# EAGLE board _v3 (EAGLE 8.5.1)
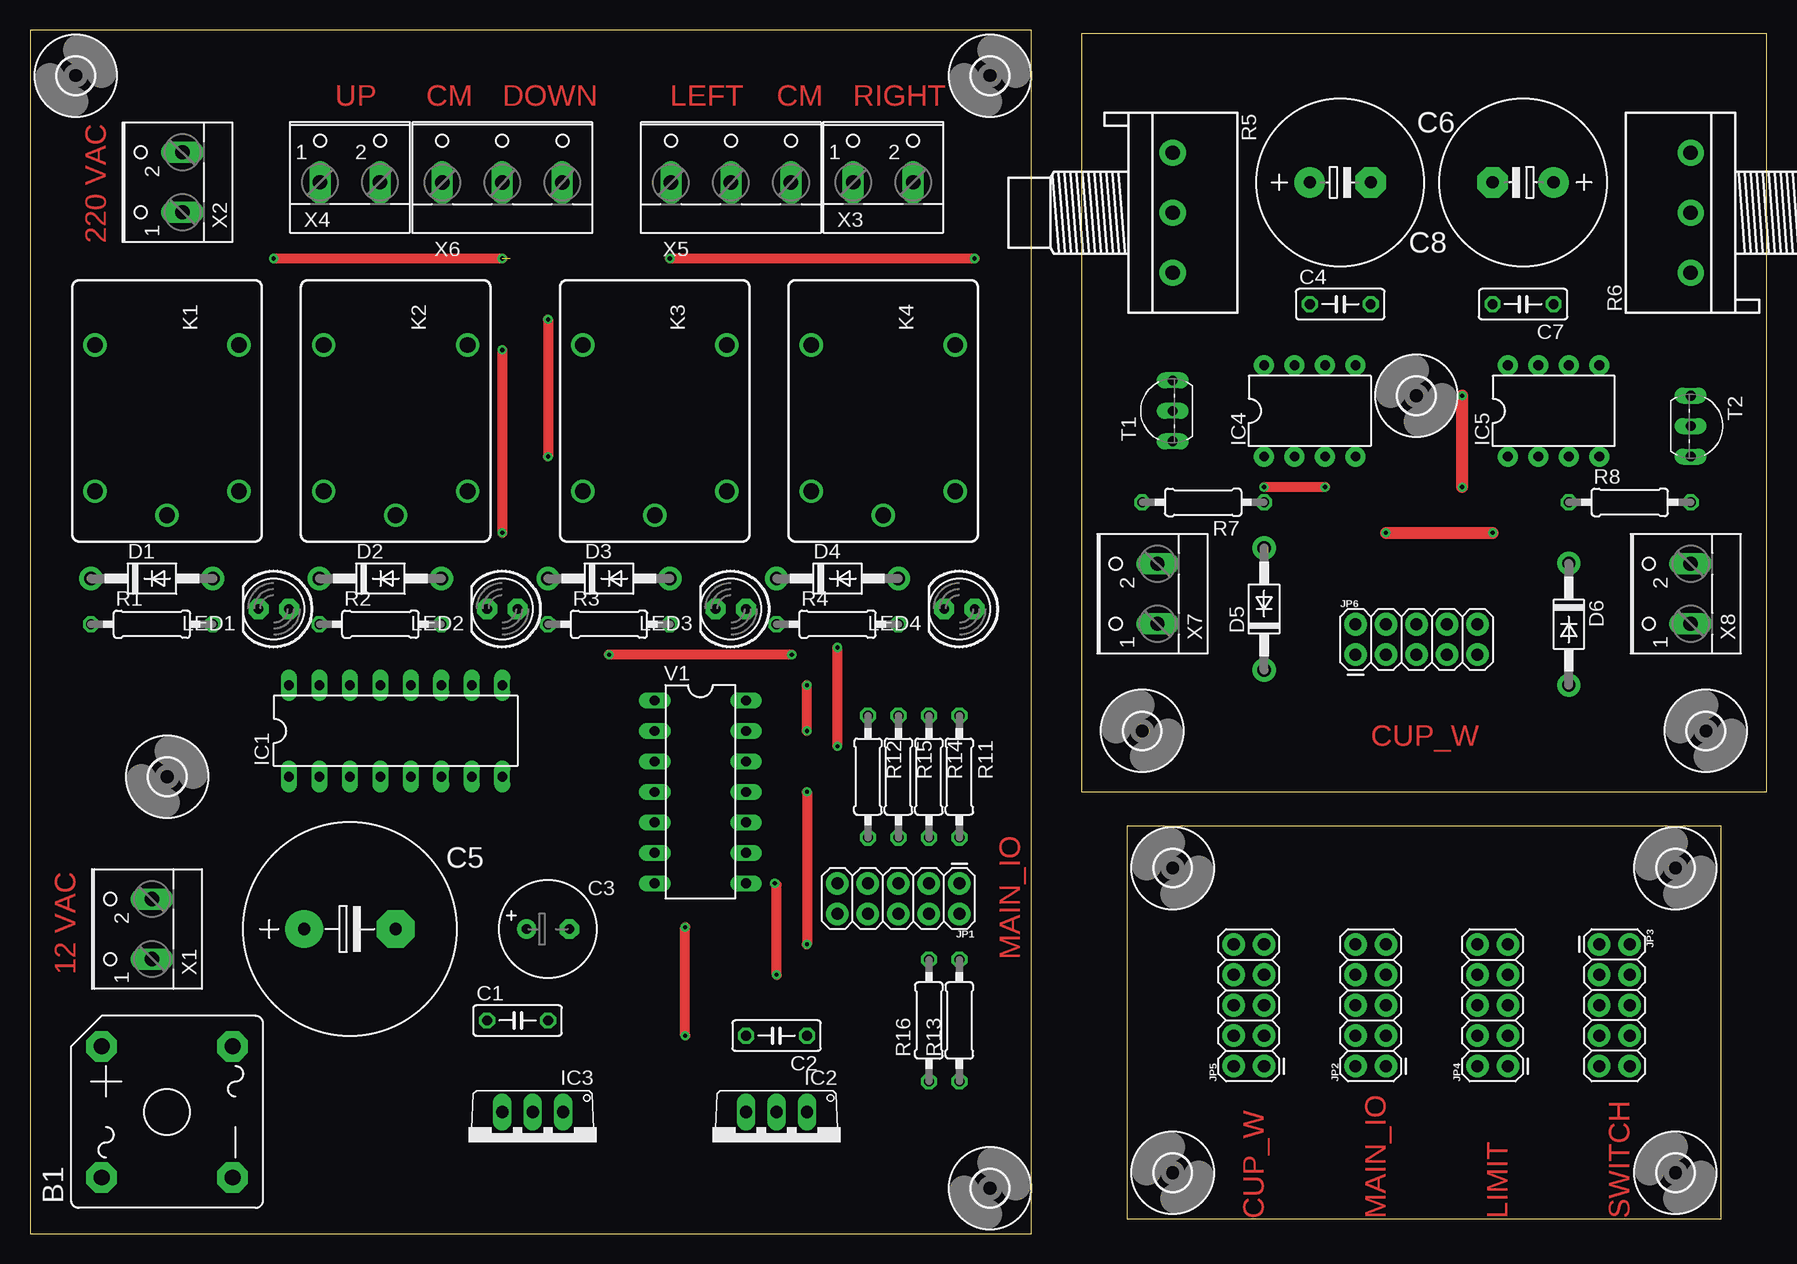
[diagram p0: board, top side]
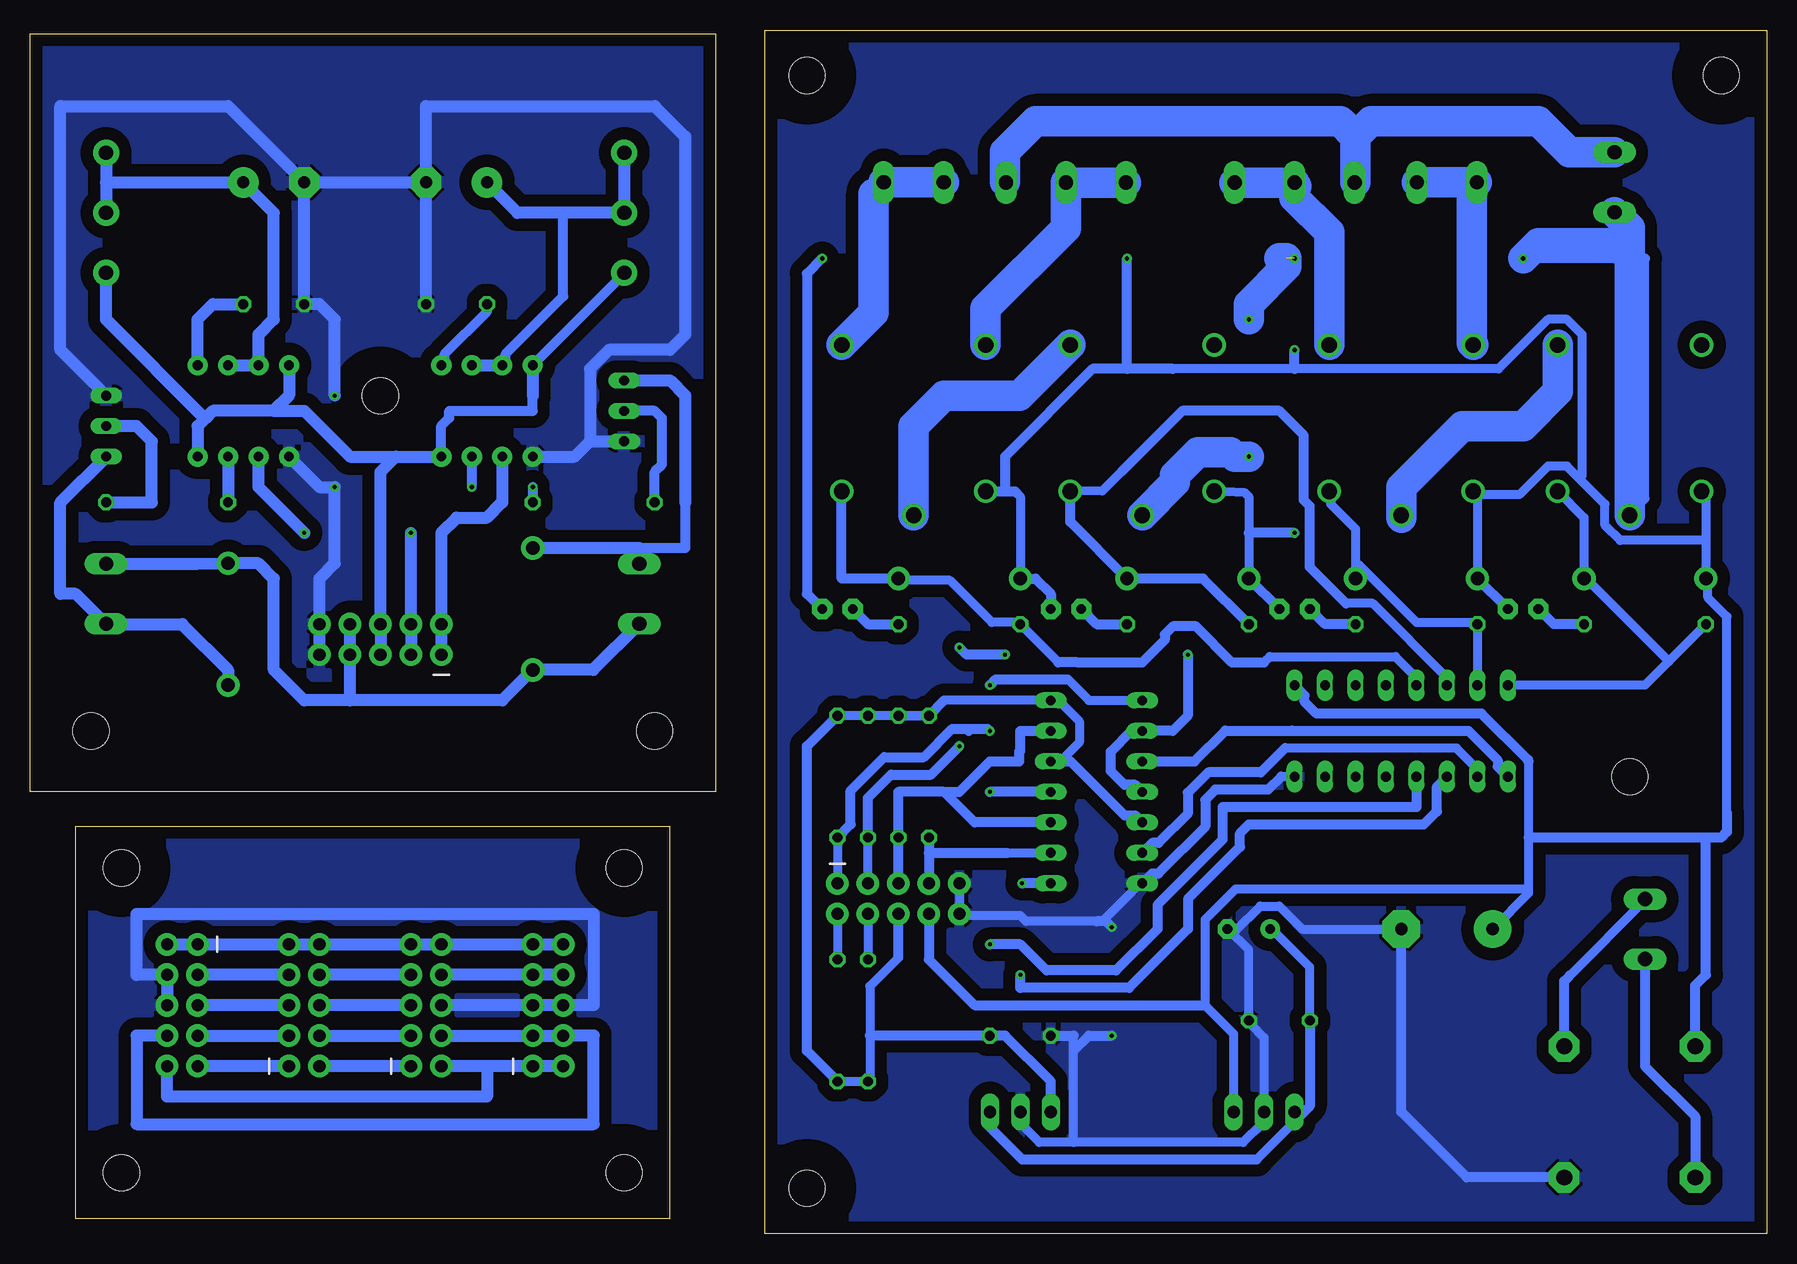
[diagram p1: board, bottom side, seen from below]

Size 144.78 x 100.32 mm. Coordinates in mm from the lower left corner, seen from the top.
Outline: 0,0 83.49,0 83.49,100.32 0,100.32 0,0
Outline: 140.97,1.27 140.97,33.96 91.45,33.96 91.45,1.27 140.97,1.27
Outline: 144.78,36.83 144.78,100 87.64,100 87.64,36.83 144.78,36.83
Copper layers (1*16): Top 0.035mm / dielectric 1.5mm / Bottom 0.035mm
Design rules "default *": minimum track width 6mil, minimum drill 0.35mm, track to track 40mil, track to pad 40mil, pad to pad 6mil, via to via 6mil, smd to smd 6mil, copper to edge 40mil, drill to drill 6mil, minimum pad ring 10mil, minimum via ring 8mil, stop-mask expansion 4mil, vias tented up to drill 0mil, thermal gap 10mil

## Footprints (pad centres in the part's own frame; a part is rotated, then mirrored left to right if it is on the bottom)
GBPC6 = drill 1.321 pad 2.54 octagon: + 5.461,5.461; - -5.461,-5.461; AC1 -5.461,5.461; AC2 5.461,-5.461
C050-025X075 = drill 0.813 octagon: 1 -2.54,0; 2 2.54,0
E3,5-8 = drill 0.813 pad 1.6: + -1.778,0 | drill 0.813 pad 1.6 octagon: - 1.778,0
E7,5-18 = drill 1.016 pad 3.15: + -3.81,0 | drill 1.016 pad 3.15 octagon: - 3.81,0
E5-13 = drill 1.016 pad 2.54: + -2.54,0 | drill 1.016 pad 2.54 octagon: - 2.54,0
DO41-10 = drill 1.118 pad 1.93: A 5.08,0; C -5.08,0
3,0 = hole 3: 0,0
DIL16 = drill 0.813 long: 1 -8.89,-3.81; 2 -6.35,-3.81; 3 -3.81,-3.81; 4 -1.27,-3.81; 5 1.27,-3.81; 6 3.81,-3.81; 7 6.35,-3.81; 8 8.89,-3.81; 9 8.89,3.81; 10 6.35,3.81; 11 3.81,3.81; 12 1.27,3.81; 13 -1.27,3.81; 14 -3.81,3.81; 15 -6.35,3.81; 16 -8.89,3.81
TO220V = drill 1.016 long: 1 -2.54,-2.54; 2 0,-2.54; 3 2.54,-2.54
DIL08-ROUND = drill 0.813 pad 1.676: 1 -3.81,-3.81; 2 -1.27,-3.81; 3 1.27,-3.81; 4 3.81,-3.81; 5 3.81,3.81; 6 1.27,3.81; 7 -1.27,3.81; 8 -3.81,3.81
2X5 = drill 1.016 pad 1.88: 1 0,0; 2 0,2.54; 3 2.54,0; 4 2.54,2.54; 5 5.08,0; 6 5.08,2.54; 7 7.62,0; 8 7.62,2.54; 9 10.16,0; 10 10.16,2.54
JS-M = drill 1.3: 1 6.7,6; 2 6.7,-6; C 8.7,0; NC -5.5,-6; NO -5.5,6
LED5MM = drill 0.813 pad 1.676 octagon: A -1.27,0; K 1.27,0
0207/10 = drill 0.813 octagon: 1 -5.08,0; 2 5.08,0
3RP/1610N = drill 1.2 pad 2.184: 1 -5,0; 2 0,0; 3 5,0
TO92-EBC-OVAL = drill 0.813 long: B 0,-1.27; C 2.54,-1.27; E -2.54,-1.27
DIL14 = drill 0.813 long: 1 -7.62,-3.81; 2 -5.08,-3.81; 3 -2.54,-3.81; 4 0,-3.81; 5 2.54,-3.81; 6 5.08,-3.81; 7 7.62,-3.81; 8 7.62,3.81; 9 5.08,3.81; 10 2.54,3.81; 11 0,3.81; 12 -2.54,3.81; 13 -5.08,3.81; 14 -7.62,3.81
W237-102 = drill 1.194 long: 1 -2.5,-1.27; 2 2.5,-1.27
W237-103 = drill 1.194 long: 1 -5,-1.29; 2 0,-1.29; 3 5,-1.29

## Placement (x,y rotation side)
B1  [GBPC6]  11.43,10.16 90 top
C1  100nF  [C050-025X075]  40.64,17.78 0 top
C2  100nF  [C050-025X075]  62.23,16.51 180 top
C3  10uF  [E3,5-8]  43.18,25.4 0 top
C4  100nF  [C050-025X075]  109.22,77.47 0 top
C5  2200uF 50V  [E7,5-18]  26.67,25.4 0 top
C6  1000uF  [E5-13]  109.22,87.63 0 top
C7  100nF  [C050-025X075]  124.46,77.47 180 top
C8  1000uF  [E5-13]  124.46,87.63 180 top
D1  1N4007  [DO41-10]  10.16,54.61 0 top
D2  1N4007  [DO41-10]  29.21,54.61 0 top
D3  1N4007  [DO41-10]  48.26,54.61 0 top
D4  1N4007  [DO41-10]  67.31,54.61 0 top
D5  1N4007  [DO41-10]  102.87,52.07 90 top
D6  1N4007  [DO41-10]  128.27,50.8 270 top
H1  MOUNT-HOLE3.0  [3,0]  80.01,3.81 0 top
H2  MOUNT-HOLE3.0  [3,0]  80.01,96.52 0 top
H3  MOUNT-HOLE3.0  [3,0]  11.43,38.1 0 top
H4  MOUNT-HOLE3.0  [3,0]  3.81,96.52 0 top
H5  MOUNT-HOLE3.0  [3,0]  137.16,5.08 90 top
H6  MOUNT-HOLE3.0  [3,0]  137.16,30.48 90 top
H7  MOUNT-HOLE3.0  [3,0]  95.25,30.48 90 top
H8  MOUNT-HOLE3.0  [3,0]  95.25,5.08 90 top
H9  MOUNT-HOLE3.0  [3,0]  115.57,69.85 90 top
H10  MOUNT-HOLE3.0  [3,0]  139.7,41.91 90 top
H11  MOUNT-HOLE3.0  [3,0]  92.71,41.91 90 top
IC1  ULN2003AN  [DIL16]  30.48,41.91 0 top
IC2  7805TV  [TO220V]  62.23,7.62 180 top
IC3  7812TV  [TO220V]  41.91,7.62 180 top
IC4  NE555N  [DIL08-ROUND]  106.68,68.58 0 top
IC5  NE555N  [DIL08-ROUND]  127,68.58 0 top
JP1  [2X5]  77.47,29.21 180 top
JP2  [2X5]  113.03,13.97 90 top
JP3  [2X5]  130.81,24.13 270 top
JP4  [2X5]  123.19,13.97 90 top
JP5  [2X5]  102.87,13.97 90 top
JP6  [2X5]  110.49,48.26 0 top
K1  JS-M1-12V-5  [JS-M]  11.43,68.58 270 top
K2  JS-M1-12V-5  [JS-M]  30.48,68.58 270 top
K3  JS-M1-12V-5  [JS-M]  52.07,68.58 270 top
K4  JS-M1-12V-5  [JS-M]  71.12,68.58 270 top
LED1  [LED5MM]  20.32,52.07 180 top
LED2  [LED5MM]  39.37,52.07 180 top
LED3  [LED5MM]  58.42,52.07 180 top
LED4  [LED5MM]  77.47,52.07 180 top
R1  1K  [0207/10]  10.16,50.8 0 top
R2  1K  [0207/10]  29.21,50.8 0 top
R3  1K  [0207/10]  48.26,50.8 0 top
R4  1K  [0207/10]  67.31,50.8 0 top
R5  50K  [3RP/1610N]  95.25,85.09 270 top
R6  50K  [3RP/1610N]  138.43,85.09 90 top
R7  1k  [0207/10]  97.79,60.96 180 top
R8  1k  [0207/10]  133.35,60.96 0 top
R11  10K  [0207/10]  77.47,38.1 270 top
R12  10K  [0207/10]  69.85,38.1 270 top
R13  10K  [0207/10]  77.47,17.78 90 top
R14  10K  [0207/10]  74.93,38.1 270 top
R15  10K  [0207/10]  72.39,38.1 270 top
R16  10K  [0207/10]  74.93,17.78 90 top
T1  2N2222  [TO92-EBC-OVAL]  93.98,68.58 90 top
T2  2N2222  [TO92-EBC-OVAL]  139.7,67.31 270 top
V1  7486N  [DIL14]  55.88,36.83 270 top
X1  [W237-102]  8.89,25.4 90 top
X2  [W237-102]  11.43,87.63 90 top
X3  [W237-102]  71.12,88.9 0 top
X4  [W237-102]  26.67,88.9 0 top
X5  [W237-103]  58.42,88.9 0 top
X6  [W237-103]  39.37,88.9 0 top
X7  [W237-102]  92.71,53.34 90 top
X8  [W237-102]  137.16,53.34 90 top

## Library data of the parts
B1 = rectifier
C1-C4 C6-C8 = rcl; SPICEPREFIX: C
C5 = rcl
D1-D6 IC4 IC5 LED1-LED4 T1 T2 = adafruit
H1-H11 = holes
IC1 = uln-udn
IC2 IC3 = linear
JP1-JP6 = SparkFun-Connectors; PROD_ID: CONN-08499; SF_ID: PRT-0778
K1-K4 = relay; MF: FARNELL; MPN: JSM1-12V-5; OC_FARNELL: 910351; OC_NEWARK: 14J1764
R1-R4 R11-R16 = rcl; SPICEPREFIX: R
R5 R6 = pot
R7 R8 = rcl-2
V1 = 74ttl-din
X1-X6 = con-wago-500
X7 X8 = con-wago-500; MPN: 237-102; OC_FARNELL: unknown; OC_NEWARK: 70K9898

## Nets
5V: C2.1 IC2.3 JP1.6 R11.1 R12.1 R13.1 R14.1 R15.1 R16.1 V1.5 V1.12 V1.14
5V1: JP2.6 JP3.4 JP3.6 JP5.5 JP5.6
5V2: IC4.4 IC4.8 IC5.4 IC5.8 JP6.5 JP6.6 R5.3 R6.1
12V: C1.1 C3.+ IC2.1 IC3.3
AC1_12: B1.AC1 X1.1
AC1_220: K1.C K3.C X2.1
AC2_12: B1.AC2 X1.2
AC2_220: X2.2 X5.3 X6.1
CUP: JP1.2 R13.2
CUP1: JP2.2 JP3.10 JP5.1 JP5.2
CUP2: IC4.2 JP6.1 JP6.2
DOWN: JP1.3 R14.2 V1.2 V1.4
DOWN1: JP2.3 JP4.4
EN_M1: IC1.1 V1.3
EN_M1_REV: IC1.2 V1.6
EN_M2: IC1.3 V1.8
EN_M2_REV: IC1.4 V1.11
GND: B1.- C1.2 C2.2 C3.- C5.- IC1.8 IC2.2 IC3.2 JP1.9 JP1.10 V1.7
GND1: JP2.9 JP2.10 JP3.1 JP3.2 JP4.9 JP4.10 JP5.9 JP5.10
GND2: C4.2 C6.- C7.2 C8.- IC4.1 IC5.1 JP6.9 JP6.10 T1.E T2.E
LEFT: JP1.7 R12.2 V1.9
LEFT1: JP2.7 JP4.8
M1_DIR_EN: K1.NO K2.C
M2_DIR_EN: K3.NO K4.C
M_DOWN: K2.NO X6.2 X6.3
M_LEFT: K4.NC X5.1 X5.2
M_RIGHT: K4.NO X3.1 X3.2
M_UP: K2.NC X4.1 X4.2
N$1: LED1.K R1.2
N$2: LED2.K R2.2
N$3: LED3.K R3.2
N$4: LED4.K R4.2
N$5: C4.1 IC4.5
N$6: D5.A T1.C X7.2
N$7: C7.1 IC5.5
N$8: D6.A T2.C X8.1
N$9: R7.2 T1.B
N$10: R8.2 T2.B
OUT_CUP: IC4.3 R7.1
OUT_WASH: IC5.3 R8.1
REL_M1: D1.A IC1.16 K1.1 R1.1
REL_M1_REV: D2.A IC1.15 K2.1 R2.1
REL_M2: D3.A IC1.14 K3.1 R3.1
REL_M2_REV: D4.A IC1.13 K4.1 R4.1
RIGHT: JP1.5 R15.2 V1.10 V1.13
RIGHT1: JP2.5 JP4.6
S_CUP: C6.+ IC4.6 IC4.7 R5.1 R5.2
S_WASH: C8.+ IC5.6 IC5.7 R6.2 R6.3
SW_DOWN: JP3.7 JP4.3
SW_LEFT: JP3.3 JP4.7
SW_RIGHT: JP3.5 JP4.5
SW_UP: JP3.9 JP4.1
UP: JP1.1 R11.2 V1.1
UP1: JP2.1 JP4.2
VIN: B1.+ C5.+ D1.C D2.C D3.C D4.C IC1.9 IC3.1 JP1.8 K1.2 K2.2 K3.2 K4.2 LED1.A LED2.A LED3.A LED4.A
VIN1: JP2.8 JP5.7 JP5.8
VIN2: D5.C D6.C JP6.7 JP6.8 X7.1 X8.2
WASH: JP1.4 R16.2
WASH1: JP2.4 JP3.8 JP5.3 JP5.4
WASH2: IC5.2 JP6.3 JP6.4

## Tracks (layer width: path | path; a pad name or v marks a point on that pad's centre or on a via)
5V
  Bottom 0.762: 68.58,44.45 V1.14 59.37,44.29 58.9,44.29 57.31,42.7 57.31,40.96 58.74,39.53 V1.12 | R15.1 R12.1 R14.1 R11.1 | R13.1 R16.1 74.77,13.02 74.77,16.51 74.77,20.64 72.39,23.02 | 51.44,34.29 V1.5
  Bottom 0.813: 68.58,44.45 R12.1 | R13.1 80.01,15.24 80.01,40.64 R11.1 | V1.5 52.65,34.87 53.54,34.87 58.04,39.37 V1.12 | IC2.3 59.69,12.7 63.5,16.51 C2.1 74.77,16.51 | 72.39,23.02 JP1.6
5V1
  Bottom 1.016: JP3.6 JP3.4 135.89,21.59 135.89,26.67 97.79,26.67 97.79,19.05 JP5.6 JP5.5 JP2.6
  pour Bottom: 91.44,34.29 139.7,34.29 140.97,33.02 140.97,2.54 139.7,1.27 91.44,1.27
5V2
  Bottom 0.813: IC4.8 95.25,80.01 | 102.87,69.85 102.87,68.58 109.83,68.58 109.83,68 110.49,67.34 IC4.4
  Bottom 1.016: IC4.8 102.87,69.85 | 95.25,80.01 R5.3 | JP6.6 JP6.5 | 114.3,64.77 IC4.4 | IC5.8 123.19,69.85 124.46,68.58 | 124.46,68.58 129.54,68.58 130.18,67.94 | 130.18,67.94 130.81,67.31 IC5.4 | 130.18,67.94 138.43,76.2 R6.1 | JP6.6 115.57,52.07 | JP6.6 115.57,63.5 114.3,64.77 | 124.46,68.58 121.92,68.58 118.11,64.77 114.3,64.77
12V
  Bottom 0.762: C3.+ 41.27,25.4 38.1,22.23 C1.1 37.78,17.62 | 42.55,6.19 38.97,9.76 38.89,9.84 IC3.3
  Bottom 0.813: 42.55,6.19 62.07,6.19 64.77,8.89 IC2.1 | C1.1 38.1,10.64 38.97,9.76
AC1_12
  Bottom 0.762: 10.16,22.86 X1.1
  Bottom 0.813: X1.1 10.16,13.97 5.97,9.78 B1.AC1
AC1_220  (via drill 0.35)  (1 unrouted)
  Top 0.813: v20.32,81.28 v39.37,81.28 | v43.18,76.2 v43.18,64.77
  Bottom 0.762: 10.16,81.28 10.16,61.28 11.43,60.01 K1.C
  Bottom 0.813: 10.16,81.28 12.7,81.28 | 12.7,81.28 v20.32,81.28 | X2.1 12.7,81.28
  Bottom 2.54: K1.C 11.43,82.55 | 11.43,82.55 11.43,83.86 X2.1 | 11.43,82.55 19.05,82.55 v20.32,81.28 | v43.18,76.2 43.18,77.47 40.04,80.61 40.04,81.28 40.64,81.28 | K3.C 49.33,62.62 49.33,63.23 47.42,65.14 44.72,65.14 44.35,64.77 v43.18,64.77
AC2_12
  Bottom 0.762: 16.43,21.51 10.16,27.78 X1.2
  Bottom 0.813: B1.AC2 16.89,21.05 16.43,21.51
AC2_220
  Bottom 0.762: 12.7,90.17 X2.2 | 34.29,87.63 X6.1
  Bottom 0.813: 34.29,90.49 34.29,87.63 | 63.18,90.49 63.5,90.17 | 63.5,87.69 X5.3
  Bottom 2.54: X2.2 16.47,90.13 19.05,92.71 33.02,92.71 34.29,91.44 | 34.29,91.44 34.29,87.63 | 34.29,91.44 35.56,92.71 60.96,92.71 63.18,90.49 | 63.5,90.17 63.5,87.69
CUP
  Bottom 0.762: JP1.2 R13.2
CUP1
  Bottom 1.016: JP5.2 JP5.1 106.68,13.97 | 106.68,13.97 JP2.2 | 106.68,13.97 106.68,11.43 133.35,11.43 JP3.10
CUP2
  Bottom 1.016: IC4.2 105.41,60.96 106.68,59.69 109.22,59.69 110.49,58.42 JP6.2 JP6.1
DOWN  (via drill 0.35)
  Top 0.813: v67.31,40.64 v67.31,48.86 | v63.5,48.26 v48.26,48.26
  Bottom 0.762: V1.2 51.44,41.91 | JP1.3 R14.2
  Bottom 0.813: v63.5,48.26 66.71,48.26 v67.31,48.86 | R14.2 74.93,36.34 72.99,38.28 69.67,38.28 v67.31,40.64 | v48.26,48.26 48.26,43.18 49.53,41.91 V1.2 52.96,41.91 54.69,40.18 54.69,38.56 53.54,37.41 52.65,37.41 V1.4
DOWN1
  Bottom 1.016: JP4.4 JP2.3
EN_M1
  Bottom 0.813: V1.3 47.7,39.37 45.14,41.93 39.56,41.93 39.54,41.9 24.87,41.9 22.43,39.47 22.43,38.94 IC1.1
EN_M1_REV
  Bottom 0.762: 40.16,40.48 25.88,40.48 24.13,38.73 IC1.2
  Bottom 0.813: V1.6 51.23,32.59 50.7,32.59 48.27,35.03 48.27,36.76 46.57,38.46 42.19,38.46 40.16,40.48
EN_M2  (via drill 0.35)
  Top 0.813: v62.23,21.59 62.23,29.06 v62.08,29.21
  Bottom 0.813: V1.8 v62.08,29.21 | IC1.3 27.51,37.26 27.51,35.21 28.61,34.11 43.18,34.11 43.92,33.37 43.92,32.24 48.25,27.91 48.25,25.41 53.16,20.5 62.23,20.5 v62.23,21.59
EN_M2_REV  (via drill 0.35)
  Top 0.813: v64.77,36.83 v64.77,24.13
  Bottom 0.813: V1.11 v64.77,36.83 | IC1.4 29.21,35.56 45.37,35.56 45.37,32.84 50.8,27.41 50.8,25.4 54.25,21.95 60.05,21.95 62.23,24.13 v64.77,24.13
GND  (via drill 0.35)
  Top 0.813: v54.61,16.51 v54.61,25.55
  Bottom 0.762: JP1.9 JP1.10 66.99,26.51 62.23,26.51 61.75,26.04 55.88,26.04 55.4,26.04 52.39,29.05 V1.7 | IC1.8 40.48,38.1 | C5.- 38.73,25.4 40.64,27.3 42.23,27.3 44.29,25.24 C3.- 44.93,25.4 43.18,23.65 C1.2 43.02,17.46 41.91,16.35 IC3.2 42.07,9.84 42.07,9.21 43.66,7.62 57.78,7.62 | 62.07,9.05 60.64,7.62 57.78,7.62 | 57.78,7.62 57.78,15.24 57.78,16.51
  Bottom 0.813: V1.7 51.23,30.05 50.7,30.05 46.82,33.93 46.82,36.16 45.97,37.01 41.57,37.01 40.48,38.1 | IC2.2 62.07,10 62.07,9.05 | C2.2 57.78,16.51 | 57.78,15.24 56.52,16.51 v54.61,16.51 | v54.61,25.55 55.09,26.04 55.88,26.04 | B1.- 25.02,4.7 30.48,10.16 C5.-
  pour Bottom: 0,100.33 83.82,100.33 83.82,0 0,0
GND1
  Bottom 1.016: JP3.2 JP3.1 JP4.9 JP4.10 JP2.9 JP2.10 JP5.9 JP5.10
GND2  (via drill 0.35)
  Top 1.016: v119.38,62.23 v119.38,69.85
  Bottom 1.016: C4.2 C6.- | JP6.9 JP6.10 120.65,54.61 119.38,55.88 v119.38,62.23 120.65,62.23 IC5.1 | C8.- C7.2 120.65,77.47 119.38,76.2 v119.38,69.85 | C8.- C6.- | C8.- 128.27,93.98 142.24,93.98 142.24,73.66 T2.E | C6.- 111.76,93.98 92.71,93.98 90.17,91.44 90.17,74.93 91.44,73.66 96.52,73.66 98.09,72.08 98.09,66.04 | 102.56,65.08 IC4.1 99.36,64.77 98.09,66.04 | 98.09,66.04 T1.E
  pour Bottom: 87.63,36.83 87.63,100.33 144.78,100.33 144.78,36.83
LEFT
  Bottom 0.762: 63.34,31.75 V1.9
  Bottom 0.813: R12.2 69.85,31.75 | 69.85,31.75 JP1.7 | 69.85,31.75 63.34,31.75
LEFT1
  Bottom 1.016: JP2.7 JP4.8
M1_DIR_EN
  Bottom 2.54: K1.NO 17.43,70.2 20.32,67.31 25.4,67.31 30.48,62.23 K2.C 30.48,59.69
M2_DIR_EN
  Bottom 2.54: K3.NO 62.3,69.85 68.58,69.85 71.12,67.31 K4.C
M_DOWN
  Bottom 0.762: 39.21,87.31 X6.2
  Bottom 2.54: K2.NO 36.48,83.47 39.37,86.36 39.37,87.15 39.21,87.31 | X6.2 X6.3
M_LEFT
  Bottom 0.813: X5.2 58.4,87.63 53.4,87.63 | 53.34,87.63 53.4,87.63 | 53.4,87.63 X5.1
  Bottom 2.54: K4.NC 65.12,77.12 58.42,83.82 X5.2 | X5.2 58.42,87.63 58.4,87.63 | X5.1 X5.2
M_RIGHT
  Bottom 0.762: X3.1 X3.2 73.82,87.31 74.45,86.68
  Bottom 2.54: K4.NO 74.45,76.75 74.45,86.68 | X3.2 68.58,87.63
M_UP
  Bottom 0.762: K2.NC 24.61,74.14 24.61,87.31 X4.1
  Bottom 2.54: K2.NC 24.61,74.21 24.61,87.31 | X4.1 X4.2
N$1
  Bottom 0.813: R1.2 17.78,50.8 LED1.K
N$2
  Bottom 0.813: R2.2 36.83,50.8 LED2.K
N$3
  Bottom 0.813: LED3.K 55.88,50.8 R3.2
N$4
  Bottom 0.813: LED4.K 74.93,50.8 R4.2
N$5
  Bottom 0.813: IC4.5 110.21,72.67 110.21,73.33 106.68,76.86 C4.1
N$6
  Bottom 0.813: 90.17,60.96 90.17,57.15 93.98,57.15
  Bottom 1.016: T1.C 91.44,71.12 90.17,69.85 90.17,60.96 | X7.2 93.98,57.15 D5.A
N$7
  Bottom 1.016: IC5.5 130.81,76.2 129.54,77.47 C7.1
N$8
  Bottom 1.016: 138.43,50.8 140.97,53.34 142.24,53.34 142.24,60.96 T2.C | 138.43,50.8 X8.1 | 138.43,50.8 132.08,50.8 128.27,46.99 D6.A
N$9
  Bottom 0.813: R7.2 92.71,63.5 92.1,64.11 92.1,67.97 92.71,68.58 T1.B
N$10
  Bottom 1.016: R8.2 134.62,60.96 134.62,66.04 135.89,67.31 T2.B
OUT_CUP  (via drill 0.35)
  Top 0.813: v107.95,62.23 v102.87,62.23
  Bottom 0.813: IC4.3 v107.95,62.23 | v102.87,62.23 R7.1
OUT_WASH
  Bottom 1.016: IC5.3 R8.1
REL_M1
  Bottom 0.762: K1.1 15.24,59.69 D1.A 14.92,54.45 8.18,47.7 | IC1.16 10.16,45.72 8.18,47.7 | R1.1 8.18,47.7
REL_M1_REV
  Bottom 0.762: IC1.15 R2.1 24.45,50.96 29.21,50.96 33.97,55.72 34.29,55.72 | 34.29,55.72 34.29,58.74 36.35,60.8 36.35,61.75 K2.1 | 34.29,55.72 D2.A
REL_M2
  Bottom 0.762: IC1.14 26.67,46.35 32.86,52.55 35.08,52.55 | 53.34,63.98 53.74,63.58 55.4,61.91 K3.1 | 53.5,54.93 D3.A
  Bottom 0.813: R3.1 46.99,54.61 D3.A 58.07,59.34 K3.1 | 35.08,52.55 38.1,55.56 38.1,60.65 38.59,61.14 38.59,66.53 40.64,68.58 48.74,68.58 53.74,63.58
REL_M2_REV
  Bottom 0.762: IC1.13 29.21,46.35 30.96,48.1 41.43,48.1 41.91,47.62 | 59.05,47.62 R4.1 62.55,50.96 64.61,50.96 68.1,54.45 72.07,54.45 D4.A
  Bottom 0.813: 41.91,47.62 41.93,47.62 41.95,47.61 44.57,47.61 47.59,50.62 49.53,50.62 50.19,49.96 50.19,49.49 52.08,47.61 57.43,47.61 57.45,47.62 59.05,47.62 | D4.A 77.12,54.61 K4.1
RIGHT
  Bottom 0.762: 60.33,34.29 V1.10 59.37,34.13 58.9,34.13 | 60.33,41.91 V1.13
  Bottom 0.813: JP1.5 R15.2 72.39,36.83 68.58,36.83 | V1.10 66.04,34.29 68.58,36.83 | 68.58,36.83 67.31,36.83 64.77,39.37 62.31,39.37 62.31,40.18 62.23,40.26 62.23,41.91 60.33,41.91
RIGHT1
  Bottom 1.016: JP2.5 JP4.6
S_CUP
  Bottom 0.813: IC4.7 105.13,72.67 105.13,73.33 100.33,78.13 100.33,85.09
  Bottom 1.016: C6.+ 104.14,85.09 100.33,85.09 R5.2 R5.1 | IC4.6 IC4.7
S_WASH
  Bottom 1.016: IC5.6 IC5.7 125.73,74.93 124.46,76.2 124.46,85.09 C8.+ | C8.+ 127.08,87.55 | R6.3 138.43,87.63 | 138.43,87.63 R6.2 | 138.43,87.63 C8.+
SW_DOWN
  Bottom 1.016: JP3.7 JP4.3
SW_LEFT
  Bottom 1.016: JP4.7 JP3.3
SW_RIGHT
  Bottom 1.016: JP4.5 JP3.5
SW_UP
  Bottom 1.016: JP4.1 JP3.9
UP  (via drill 0.35)
  Top 0.813: v64.77,41.91 v64.77,45.72
  Bottom 0.762: V1.1 56.52,44.45 58.26,46.2 | R11.2 JP1.1
  Bottom 0.813: R11.2 76.38,34.11 76.38,36.94 73.59,39.73 70.27,39.73 67.91,42.09 66.71,42.09 | 66.71,42.09 66.53,41.91 | v64.77,45.72 64.29,46.2 58.26,46.2 | 66.71,42.09 64.95,42.09 v64.77,41.91
UP1
  Bottom 1.016: JP2.1 JP4.2
VIN  (via drill 0.35)
  Top 0.813: v39.37,73.66 v39.37,58.42 | v53.34,81.28 v78.74,81.28
  Bottom 0.762: D4.C 62.23,61.44 62.55,61.75 | D2.C 24.13,61.44 24.45,61.75 K2.2 23.81,61.59 20.64,61.59 18.26,63.98 16.67,63.98 15.64,62.94 | 5.08,57.78 5.08,61.44 5.4,61.75 K1.2 | 5.08,57.78 D1.C 4.92,54.29 4.92,53.02 3.33,51.44 3.33,35.08 | 39.37,45.09 IC1.9 | 19.84,28.73 19.84,28.42 C5.+ | 19.84,28.73 19.84,33.02 19.84,39.37 19.84,39.53 | IC3.1 44.45,16.67 46.83,19.05 46.83,26.19 44.29,28.73 19.84,28.73 | 15.64,62.94 13.49,60.8 13.49,59.05 12.22,57.78 5.08,57.78 | 50.32,72.07 49.53,72.07 39.37,72.07 22.38,72.07 18.26,76.2 16.67,76.2 15.4,74.93 15.4,63.18 15.64,62.94 | D3.C 43.18,58.42 43.18,61.44 43.5,61.75 K3.2 | 70.01,26.35 JP1.8
  Bottom 0.813: 39.37,72.07 v39.37,73.66 | v39.37,58.42 43.18,58.42 | 19.84,39.37 19.89,39.41 19.89,39.47 23.78,43.36 37.53,43.36 38.53,44.35 38.53,44.88 IC1.9 | K4.2 63.5,61.88 | 63.5,61.88 62.67,61.88 62.55,61.75 | 49.53,72.07 53.34,72.07 | 53.34,72.07 56.2,72.07 63.5,64.77 63.5,61.88 | 46.83,19.05 66.04,19.05 69.85,22.86 JP1.8 | 3.33,35.08 3.33,33.5 3.81,33.02 5.08,33.02 | 5.08,33.02 19.84,33.02 | B1.+ 5.97,20.7 5.08,21.59 5.08,33.02 | 53.34,72.07 v53.34,81.28 | v78.74,81.28 80.01,80.01 80.01,53.34 LED4.A | D4.C 60.96,54.61 59.69,53.34 LED3.A | D3.C LED2.A | LED1.A D2.C
VIN1
  Bottom 1.016: JP5.8 JP5.7 JP2.8
VIN2
  Bottom 1.016: X7.1 97.83,46.99 D5.C 105.41,44.45 118.11,44.45 | JP6.8 JP6.7 118.11,44.45 | X8.2 130.85,55.84 D6.C 125.73,55.88 124.46,54.61 124.46,46.99 121.92,44.45 118.11,44.45
WASH
  Bottom 0.762: JP1.4 R16.2
WASH1
  Bottom 1.016: JP2.4 JP5.3 JP5.4 97.79,16.51 97.79,9.14 135.89,9.14 135.89,16.51 JP3.8
WASH2  (via drill 0.35)
  Top 1.016: v113.03,58.42 v121.92,58.42
  Bottom 1.016: JP6.3 JP6.4 v113.03,58.42 | v121.92,58.42 125.73,62.23 IC5.2

## Text on the board
Top: UP | CM | DOWN | LEFT | CM | RIGHT | 220 VAC | CUP_W | MAIN_IO | 12 VAC | CUP_W | MAIN_IO | LIMIT | SWITCH